# EAGLE board ECG_V3 (EAGLE 7.6.0)
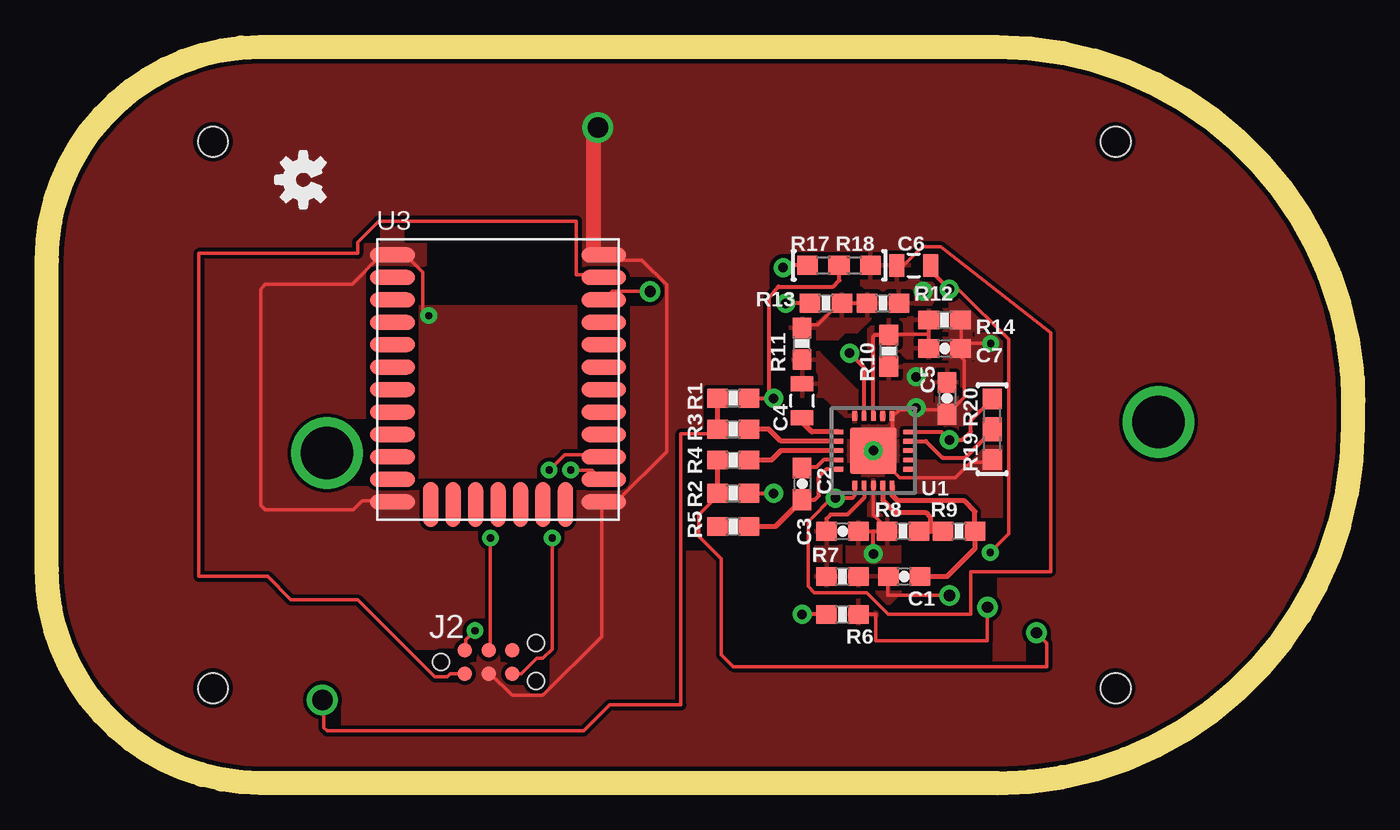
[diagram p0: board, top side]
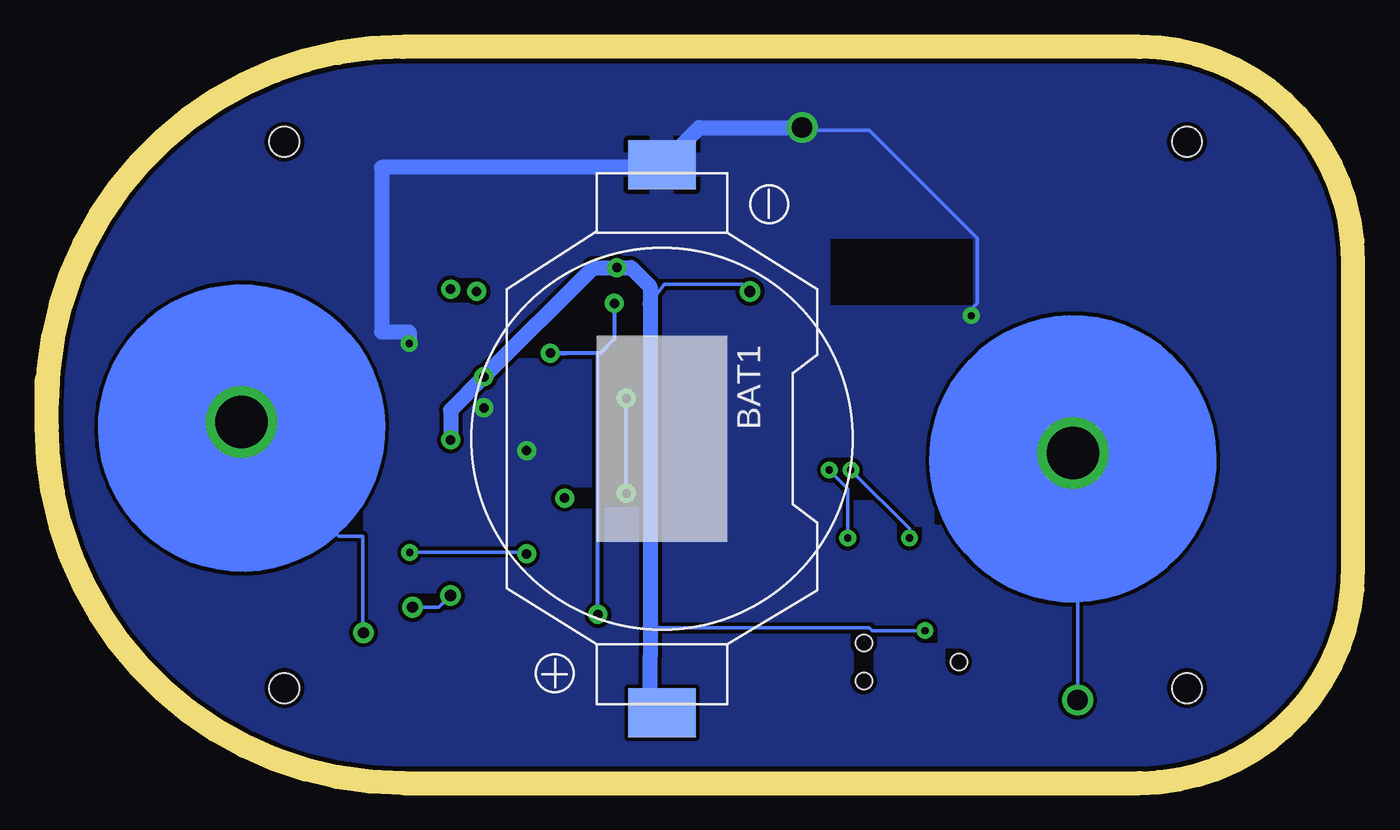
[diagram p1: board, bottom side, seen from below]

Size 69.85 x 39.37 mm. Coordinates in mm from the lower left corner, seen from the top.
Outline: 69.85,20.32 arc90 50.8,39.37 11.43,39.37 arc90 0,27.94 0,11.43 arc90 11.43,0 50.8,0 arc90 69.85,19.05 69.85,21.59
Copper layers (1*16): Top 0.035mm / dielectric 1.5mm / Bottom 0.035mm
Design rules "SparkFun": minimum track width 8mil, minimum drill 20mil, track to track 8mil, track to pad 8mil, pad to pad 8mil, via to via 8mil, smd to smd 8mil, copper to edge 10mil, drill to drill 8mil, minimum pad ring 12mil, minimum via ring 10mil, stop-mask expansion 4mil, vias tented up to drill 25mil, thermal gap 10mil
Holes 1.6 mm at 57.15,34.29 8.89,5.08 57.15,5.08 8.89,34.29

## Footprints (pad centres in the part's own frame; a part is rotated, then mirrored left to right if it is on the bottom)
KZH20SMD = smd 2.6 x 3.6: + 14.65,0; - -14.65,0
0603-CAP = smd 1.1 x 1: 1 -0.85,0; 2 0.85,0
0805 = smd 0.8 x 1.2: 1 -0.9,0; 2 0.9,0
TC2030-MCP-NL = smd 0.787 x 0.787: 1 1.27,-0.635; 2 1.27,0.635; 3 2.54,-0.635; 4 2.54,0.635; 5 3.81,-0.635; 6 3.81,0.635 | hole 0.889: 0,0; 5.08,-1.016; 5.08,1.016
PETAL-LONG-2 = drill 2.794: 1 0,0
0603-RES = smd 1.1 x 1: 1 -0.85,0; 2 0.85,0
0603 = smd 1.1 x 1: 1 -0.85,0; 2 0.85,0
LFCSP_20 = smd 0.5 x 0.25: 1 -1.85,1; 2 -1.85,0.5; 3 -1.85,0; 4 -1.85,-0.5; 5 -1.85,-1; 11 1.85,-1; 12 1.85,-0.5; 13 1.85,0; 14 1.85,0.5; 15 1.85,1 | smd 0.25 x 0.5: 6 -1,-1.85; 7 -0.5,-1.85; 8 0,-1.85; 9 0.5,-1.85; 10 1,-1.85; 16 1,1.85; 17 0.5,1.85; 18 0,1.85; 19 -0.5,1.85; 20 -1,1.85 | smd 2.5 x 2.5: PAD 0,0
BGM111-A = smd 2.4 x 0.8: GND -5.65,6.65; GND@2 -5.65,-6.55; GND@3 5.65,-6.55; GND@4 5.65,6.65; PA0 -5.65,1.85; PA1 -5.65,0.65; PA2 -5.65,-0.55; PA3 -5.65,-1.75; PA4 -5.65,-2.95; PA5 -5.65,-4.15; PB11 -5.65,-5.35; PD13 -5.65,5.45; PD14 -5.65,4.25; PD15 -5.65,3.05; PF0 5.65,-5.35; PF1 5.65,-4.15; PF2 5.65,-2.95; PF3 5.65,-1.75; PF4 5.65,-0.55; PF5 5.65,0.65; PF6 5.65,1.85; PF7 5.65,3.05; RESET 5.65,5.45; VDD 5.65,4.25 | smd 0.8 x 2.4: PB13 -3.6,-6.7; PC6 -2.4,-6.7; PC7 -1.2,-6.7; PC8 0,-6.7; PC9 1.2,-6.7; PC10 2.4,-6.7; PC11 3.6,-6.7

## Placement (x,y rotation side)
BAT1  2032  [KZH20SMD]  36.96,18.41 270 bottom
C1  1.5nF  [0603-CAP]  45.85,11.05 180 top
C2  1nF  [0603-CAP]  40.39,16 270 top
C3  10nF  [0603-CAP]  42.55,13.46 180 top
C4  0.33uF  [0805]  40.39,20.45 90 top
C5  0.1uF  [0603-CAP]  48.13,20.57 270 top
C6  0.33uF  [0805]  46.36,27.69 0 top
C7  0.1uf  [0603-CAP]  48.01,23.24 0 top
J2  [TC2030-MCP-NL]  21.08,6.48 0 top
JP1  SEWTAP2  [PETAL-LONG-2]  14.99,17.65 0 bottom
JP2  SEWTAP2  [PETAL-LONG-2]  59.44,19.3 0 bottom
LOGO1  OSHW-LOGOS  [OSHW-LOGO-S]  13.72,32.26 90 top
R1  10M  [0603-RES]  36.7,20.57 0 top
R2  10M  [0603-RES]  36.7,15.49 0 top
R3  180k  [0603-RES]  36.7,18.92 0 top
R4  180k  [0603-RES]  36.7,17.27 0 top
R5  360k  [0603-RES]  36.7,13.72 180 top
R6  1M  [0603-RES]  42.55,9.02 180 top
R7  1M  [0603-RES]  42.55,11.05 180 top
R8  100k  [0603-RES]  45.78,13.46 180 top
R9  1M  [0603-RES]  48.77,13.46 180 top
R10  10M  [0603-RES]  45.02,23.11 90 top
R11  10M  [0603-RES]  40.39,23.5 90 top
R12  1.4M  [0603-RES]  44.7,25.65 0 top
R13  10M  [0603-RES]  41.66,25.65 0 top
R14  10M  [0603-RES]  48.01,24.77 180 top
R17  0  [0603]  41.53,27.69 0 top
R18  DNP  [0603]  43.18,27.69 0 top
R19  0  [0603]  50.55,18.16 90 top
R20  DNP  [0603]  50.55,19.69 90 top
U1  AD8232  [LFCSP_20]  44.2,17.78 0 top
U3  BGM111-VISUAL-A  [BGM111-A]  24.13,21.59 0 top

## Library data of the parts
BAT1 = SMTU-2032-1
C1-C3 C5 C7 R1-R14 = SparkFun-Passives
C4 C6 = SparkFun-Capacitors
J2 = tag-connect
JP1 JP2 = LilyPad-Wearables
LOGO1 = SparkFun-Aesthetics
R17-R20 = SparkFun-Resistors; PROD_ID: RES-08609
U1 = AD8232
U3 = sf-bluegiga; ANTENNA: On-module ceramic chip antenna

## Nets
3.3V: BAT1.+ C5.1 J2.2 R10.1 R17.1 R20.2 U1.15 U1.17 U3.VDD
GND: BAT1.- C5.2 C7.2 J2.3 R14.1 R19.1 U1.16 U1.PAD U3.GND U3.GND@2 U3.GND@3 U3.GND@4
LA: JP1.1 R1.1 R3.1
LO+: U1.12
LO-: U1.11
N$1: R3.2 U1.2
N$2: R4.2 U1.3
N$3: C3.2 R7.2 U1.7
N$4: C4.2 R11.1 U1.20
N$5: C7.1 R10.2 R14.2 U1.18
N$7: R8.1 R9.2 U1.9
N$8: R6.2 R13.1 U1.19
N$9: C1.2 R6.1 R7.1
N$11: R19.2 R20.1 U1.14
N$13: C4.1 U1.1
N$14: R11.2 R12.1 R13.2
N$16: C6.1 R12.2 R18.2 U1.6
N$17: C2.1 U1.4
N$18: C2.2 R5.1 U1.5
N$20: R1.2 R2.2 R17.2 R18.1
N$29: J2.1 U3.RESET
N$31: J2.5 U3.PF0
N$33: J2.4 U3.PF1
RA: JP2.1 R2.1 R4.1
REFOUT: C3.1 C6.2 R8.2 U1.8
RL: R5.2
SDN: U1.13
SIGNAL_OUT: C1.1 R9.1 U1.10

## Tracks (layer width: path | path; a pad name or v marks a point on that pad's centre or on a via)
3.3V  (via drill 0.38, 0.51, 0.6)
  Top 0.178: 39.32,27.56 v39.37,27.56 | v22.9,8.15 22.4,7.66 22.4,7.16 J2.2 | v32.26,26.29 30.23,26.29 U3.VDD
  Top 0.203: U1.15 47.83,18.78 v48.26,18.35 48.96,18.35 49.4,18.8 49.4,19.39 R20.2 | R17.1 39.5,27.69 v39.37,27.56
  Bottom 0.178: 37.34,6.43 37.59,6.73 | 37.59,25.65 36.83,26.67 32.64,26.67 v32.26,26.29 32.14,26.31 | v22.9,8.15 25.7,8.15 25.87,8.32 37.59,8.32
  Bottom 0.813: v48.26,18.35 48.26,19.94 v46.48,21.72 40.64,27.56 v39.37,27.56 38.61,27.56 37.59,26.54 37.59,25.65 37.59,8.32 37.59,6.73 37.59,3.17 36.96,3.81 | BAT1.+ 36.96,3.81 | 36.96,3.81 36.58,4.19
  pour Top (isolate 0.203): 44.58,19.43 44.83,19.43 44.83,21.08 48.64,21.08 48.64,22.35 44.58,22.35
GND  (via drill 0.38, 0.51, 1.1)
  Top 0.178: C7.2 48.9,23.27 48.9,24.75 R14.1 | U1.16 45.26,19.63 45.59,19.96 46.42,19.96 v46.48,20.07 46.58,19.96 47.9,19.96 48.07,19.8 C5.2 48.24,19.8 49.06,20.62 49.06,22.61 48.9,22.77 48.9,23.1 C7.2 | R19.1 50.55,17.16 49.39,17.16 48.57,16.33 45.59,16.33 44.27,17.65 U1.PAD | U3.GND@4 30.16,27.97 31.81,27.97 33.13,26.65 33.13,17.73 30.49,15.09 29.83,15.09 U3.GND@3 29.67,14.92 29.67,7.82 26.53,4.69 24.88,4.69 23.72,5.84 J2.3 | U3.GND@2 18.44,15.09 16.87,15.09 16.38,14.6 11.68,14.6 11.43,14.86 11.43,26.42 11.68,26.67 16.32,26.67 17.78,28.13 18.44,28.13 U3.GND 18.61,28.13 19.27,28.13 20.09,27.3 20.09,25.32 v20.42,24.99 | v50.47,23.51 48.82,23.51 C7.2
  Top 0.203: 44.7,18.28 U1.PAD 45.2,18.78 U1.16
  Top 0.813: v29.46,35.05 29.21,34.8 29.21,28.32 29.29,28.24 U3.GND@4
  Bottom 0.178: 37.26,32.92 BAT1.- | v20.42,24.99 20.42,25.32 20.09,25.65 20.09,29.12 25.87,34.9 29.17,34.9 v29.46,35.05
  Bottom 0.813: BAT1.- 34.97,35.05 v29.46,35.05 | 37.26,32.92 51.94,32.92 51.94,24.13 50.47,24.13 v50.47,23.51
  other vias: 44.2,17.78
  pour Bottom: -1.27,41.91 71.12,41.91 71.12,-2.54 -1.27,-2.54
  pour Top: -1.27,41.91 71.12,41.91 71.12,38.1 71.12,-2.54 -1.27,-2.54
LA  (via drill 1.1)
  Top 0.178: 35.78,18.88 R3.1 35.85,18.67 33.91,18.67 33.91,4.19 30.1,4.19 28.7,2.79 14.99,2.79 14.82,2.96 14.82,4.36 arc-90 v14.73,4.44
  Top 0.254: R1.1 R3.1
  Bottom 0.178: v14.73,4.44 14.73,17.4 JP1.1
N$1
  Top 0.254: U1.2 39.25,18.28 38.61,18.92 R3.2
N$2
  Top 0.254: U1.3 39.24,17.78 38.74,17.27 R4.2
N$3
  Top 0.203: U1.7 43.7,15.25 42.8,14.35 41.91,14.35 41.7,14.14 C3.2
  pour Top (isolate 0.203): 41.15,13.97 42.42,13.97 42.42,10.54 41.15,10.54
N$4
  pour Top (isolate 0.203): 43.31,19.3 43.31,20.95 41.28,22.99 39.88,22.99 39.88,20.7 41.53,20.7 43.05,19.3
N$5
  Top 0.178: 47.17,24 47.17,24.66 R14.2 | 47.17,24 47.17,23.34 C7.1 | 47.17,24 45.02,24 R10.2
  Top 0.203: U1.18 44.2,23.88 44.28,23.96 R10.2
  pour Top: 44.07,24.38 44.32,24.38 44.7,24.77 45.97,24.77 46.48,25.27 47.88,25.27 47.88,22.73 46.23,22.73 45.97,22.73 45.72,22.99 45.59,22.99 45.34,23.24 43.94,23.24 43.94,24.26
N$7
  Top 0.254: U1.9 44.7,15.12 45.34,14.48 46.99,14.48 47.24,14.22 47.24,13.46 | R8.1 47.24,13.46 | R9.2 47.24,13.46
N$8  (via drill 0.51)
  Top 0.203: U1.19 43.7,22.22 v42.93,22.99 | R13.1 v39.5,25.65 | R6.2 v40.39,9.02
  Bottom 0.203: 42.04,22.99 v42.93,22.99 40.39,22.99 | 40.39,22.99 40.26,22.99 39.5,23.75 v39.5,25.65 | v40.39,9.02 40.39,22.99
N$9  (via drill 0.6)
  Top 0.178: R6.1 44.32,9.02 44.32,7.62 50.29,7.62 v50.29,9.4 | v48.26,10.03 44.96,10.03 44.96,11.01 C1.2
  Bottom 0.178: v50.29,9.4 48.9,9.4 v48.26,10.03
  pour Top (isolate 0.203): 42.93,11.43 45.85,11.43 45.85,10.41 43.94,8.51 42.93,8.51
N$11
  Top 0.203: U1.14 47,18.28 47.88,17.4 49.11,17.4 R20.1 R19.2
N$13
  Top 0.254: U1.1 40.91,18.78 40.39,19.3 C4.1
N$14
  Top 0.178: 43.87,25.65 R12.1 R13.2 42.38,25.65 41.22,24.5 40.4,24.5 R11.2
  pour Top: 39.75,24.89 39.75,24 40.01,23.75 41.15,23.75 42.29,23.75 42.67,24.13 43.31,24.13 44.07,24.89 44.45,25.27 44.45,26.16 42.04,26.16 42.04,25.4 41.91,25.27 41.28,24.64 40.89,24.64 40.89,24.89
N$16  (via drill 0.51)
  Top 0.178: C6.1 45.82,27.69 46.81,28.68 47.8,28.68 53.67,24.08 53.67,11.3 49.4,11.3 49.4,9.03 45,9.03 43.84,10.19 41.03,10.19 40.7,10.52 40.7,13.98 42.02,15.3 v42.16,15.24
  Top 0.203: 45.59,25.65 R12.2 | U1.6 43.2,15.38 43.05,15.24 v42.16,15.24
  other vias: 46.86,26.29
  pour Top (isolate 0.254): 45.09,25.4 47.12,25.4 47.5,26.04 47.5,26.54 47.12,26.92 46.23,26.92 46.1,27.05 46.1,28.07 44.45,28.07 44.2,28.32 43.56,28.32 43.56,26.67
N$17
  Top 0.203: U1.4 41.54,17.28 41.15,16.89 40.39,16.89 C2.1
N$18
  Top 0.203: C2.2 41.06,15.15 41.28,15.37 41.28,16.38 41.67,16.78 U1.5 | R5.1 37.59,13.72
  Top 0.254: C2.2 38.95,13.72 37.59,13.72
N$20  (via drill 0.51)
  Top 0.203: R2.2 v38.86,15.49 | R1.2 v38.86,20.57 38.61,20.83 38.61,25.91 39.12,26.54 42.04,26.54 42.38,26.88 R17.2 R18.1
  Bottom 0.203: v38.86,15.49 v38.86,20.57
N$29
  Top 0.178: J2.1 21.58,5.84 21.41,5.68 20.75,5.68 16.62,9.8 13.06,9.8 11.81,11.05 8.13,11.05 8.13,28.32 16.62,28.32 16.62,28.93 17.74,30.05 28.32,30.05 28.32,27.18 29.78,27.18 U3.RESET 29.67,27.14 29.01,27.01
N$31  (via drill 0.38)
  Top 0.178: J2.5 25.38,5.84 26.2,6.67 26.53,6.67 27.03,7.16 v27.03,13.11 | v28.02,16.74 29.17,16.74 29.67,16.24 U3.PF0
  Bottom 0.178: v27.03,13.11 27.03,15.75 v28.02,16.74
N$33  (via drill 0.38)
  Top 0.178: v23.72,13.11 23.72,7.16 J2.4 | v26.86,16.74 27.69,17.56 29.67,17.56 U3.PF1
  Bottom 0.178: v23.72,13.11 23.72,13.6 v26.86,16.74
RA  (via drill 0.6)
  Top 0.178: R2.1 35.85,15.34 34.86,14.35 34.86,13.19 36.07,11.99 36.07,6.86 36.7,6.22 53.47,6.22 53.47,7.47 52.86,8.08 v52.92,8.04
  Top 0.254: R4.1 R2.1
  Bottom 0.178: v52.92,8.04 52.96,8.04 52.96,13.21 54.23,13.21 JP2.1
REFOUT  (via drill 0.38, 0.51)
  Top 0.178: U1.8 44.2,14.35 44.93,13.61 R8.2 44.86,13.44 44.2,13.44 43.54,13.44 C3.1 | v50.44,12.33 51.44,13.32 51.44,23.72 48.79,26.37 48.3,26.37 v48.26,26.42
  Top 0.203: C6.2 47.24,27.43 v48.26,26.42 | v44.2,12.26 44.2,13.44 44.2,13.46
  Top 0.254: R8.2 44.96,13.59
  Bottom 0.178: v44.2,12.26 44.2,12.33 v50.44,12.33
  pour Top: 43.94,16.26 44.45,16.26 44.45,14.48 44.83,14.1 45.59,14.1 45.59,11.81 42.8,11.81 42.8,13.97 43.94,13.97
SIGNAL_OUT
  Top 0.254: U1.10 45.2,15.38 45.47,15.11 49.02,15.11 49.62,14.52 R9.1 49.62,12.53 48.13,11.05 C1.1